# Altium PCB FM Electrosense Wideband Converter v2.0.PcbDoc (part 2 of 2)
Units mm, origin at the board's own origin, x right, y up, seen from the top; angles counter-clockwise.
Board outline 70 x 70 mm, 4 copper layers (Top Layer, InternalPlane1, InternalPlane2, Bottom Layer), stack 1.963 mm thick; 135 components, 101 nets, 455 pads, 396 vias.
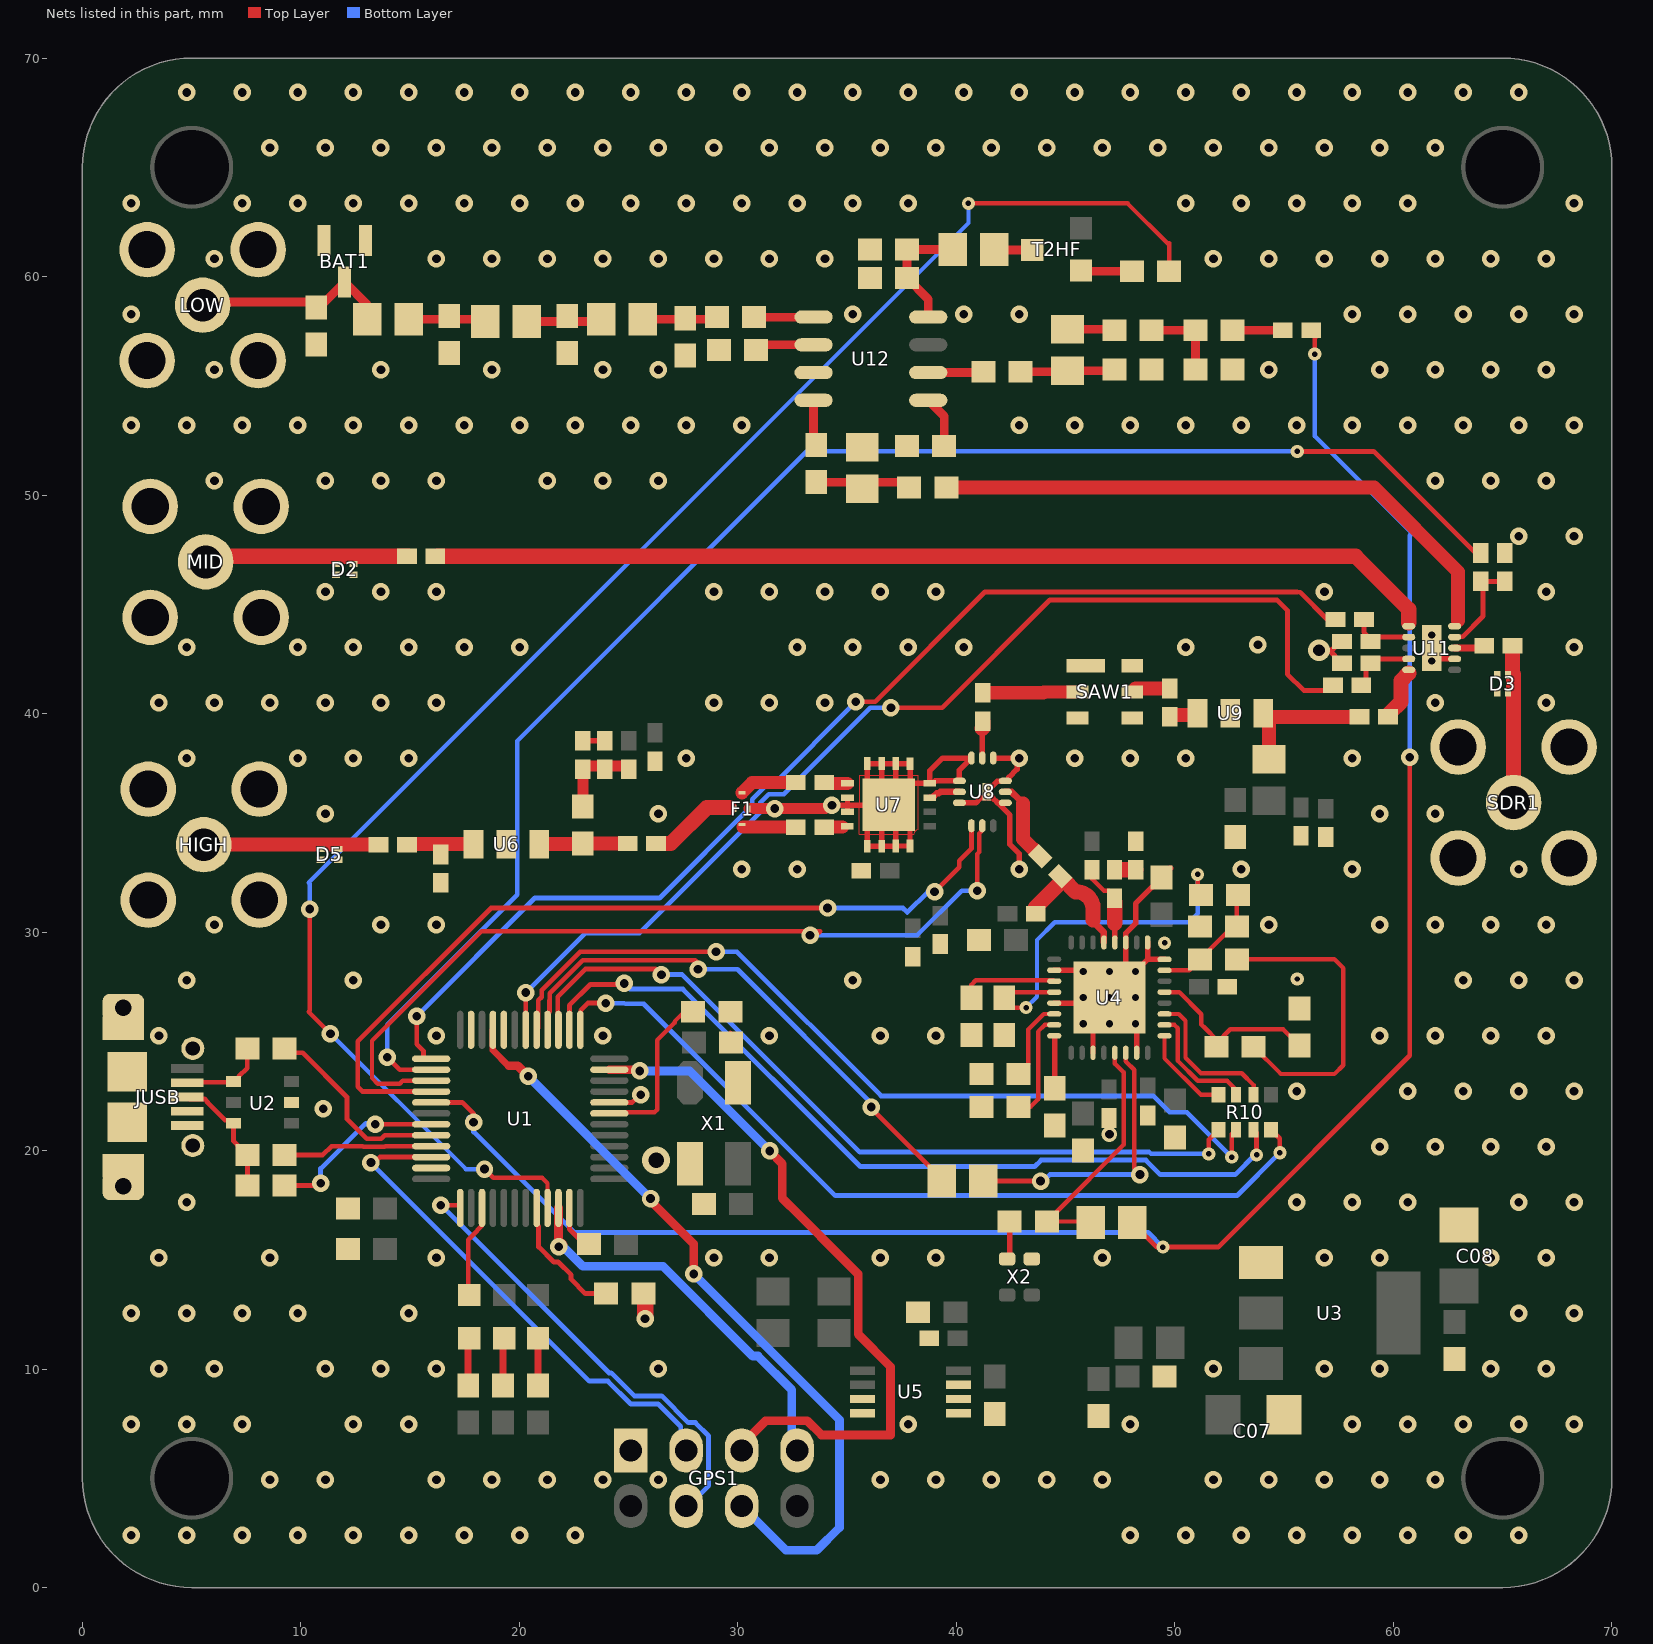
[diagram p4: the nets of this part, all layers, seen from the top]

## Via types
v1: diameter 0.8, hole 0.4, Top Layer to Bottom Layer, 354 vias
v2: diameter 0.6, hole 0.25, Top Layer to Bottom Layer, 20 vias
v3: diameter 0.66, hole 0.33, Top Layer to Bottom Layer, tented top, 11 vias
v4: diameter 1.27, hole 0.711, Top Layer to Bottom Layer, 9 vias
v5: diameter 1, hole 0.54, Top Layer to Bottom Layer, 1 vias
v6: diameter 0.7, hole 0.4, Top Layer to Bottom Layer, 1 vias

## Nets (pads, with @x,y where several pads share a name; then routed paths per layer and width w, separated by ;. In a path a pad name is that pad's centre, name@x,y a point inside that pad or via, vN(x,y) a via of type N, cw(c..) or ccw(c..) an arc to the next point about the centre after c; other vN are vias at no path point) (continued)
CPU_TX: GPS1.6 U1.21 | length 35.9
  Top Layer w0.3: U1.21@18.786,25.525 18.786,24.593 19.504,23.875
  Top Layer w0.4: 19.504,23.875 19.925,23.875 v1(20.4,23.4) ; v1(26,17.8) 26,17.7 27.98,15.72 v1(27.98,14.35) ; GPS1.6@30.17,3.73 GPS1.6@30.17,4.288
  Bottom Layer w0.4: v1(20.4,23.4) v1(26,17.8) ; v1(27.98,14.35) 34.65,7.68 34.65,2.75 33.6,1.7 32.2,1.7 GPS1.6@30.17,3.73
CPU_USB_LED: U1.39 USB.2 | length 3.9
  Top Layer w0.22: USB.2@17.654,13.687 17.654,15.915 18.066,16.327 18.066,16.348 18.271,16.553 18.271,17.36 U1.39@18.286,17.375
CS_PLL: R10.5 U1.14 | length 38.5
  Top Layer w0.22: U1.14@22.286,25.525 22.286,26.65 23.236,27.6 24.65,27.6 v1@24.8,27.75 ; R10.5@53.6,20.95 53.736,20.814 v2(53.736,19.8)
  Bottom Layer w0.22: v1(24.8,27.65) 25.06,27.39 27.48,27.39 35.6,19.27 43.587,19.27 43.877,19.56 48.673,19.56 49.333,18.9 52.764,18.9 53.664,19.8 v2(53.736,19.8)
CS_U1: R10.6 U4.3 | length 6.9
  Top Layer w0.2: U4.3@49.525,26.25 50.178,26.25 50.486,25.942 50.486,24.247 51.191,23.542 53.058,23.542 53.6,23 R10.6@53.6,22.55
GND: BAT1.1 BAT1.2 C01.1 C02.1 C03.1 C04.1 C05.1 C06.1 C07.2 C08.2 C09.1 C10.1 C11.1 C12.1 C13.1 C14.1 C15.1 C16.1 C17.1 C18.1 C19.1 C20.1 C21.1 C22.1 C23.1 C25.1 C28.1 C29.1 C32.1 C33.2 C34.1 C38.1 C39.1 C40.1 C41.1 C45.2 C46.2 C47.1 C54.1 C55.1 C56.1 C57.1 C58.1 C59.1 C60.1 C62.2 C64.1 D2.1 D2.2 D3.1 D3.2 D5.1 D5.2 F1.4 GPS1.1 HIGH.2 HIGH.3 HIGH.4 HIGH.5 JUSB.4 JUSB.5 JUSB.6 L9.1 LOW.2 LOW.3 LOW.4 LOW.5 MID.2 MID.3 MID.4 MID.5 R01.1 R08.1 R14.1 R17.1 R24.1 R26.1 R27.2 R28.2 SAW1.1 SAW1.3 SAW1.4 SAW1.6 SDR1.2 SDR1.3 SDR1.4 SDR1.5 U1.8 U1.20 U1.23 U1.35 U1.47 U2.2 U3.1 U4.8 U4.9 U4.11 U4.18 U4.21 U4.27 U4.31 U4.33 U5.3 U5.4 U5.5 U5.6 U5.7 U6.2 U7.4 U7.5 U7.6 U7.7 U7.8 U7.10 U7.11 U7.13 U7.14 U7.15 U7.16 U7.17 U8.1 U8.3 U8.4 U8.6 U8.10 U8.12 U8.13 U9.2 U11.7 U11.11 U12.3 X1.2 X1.4 X2.2 | length 76.4
  Top Layer w0.22: JUSB.6@1.8,18.012 2.148,18.36 JUSB.6@1.87,18.36 ; U1.35@15.946,19.185 U1.35@15.961,19.2 ; U1.47@22.286,17.375 22.286,16.409 22.975,15.72 C02.1@23.183,15.72 ; U1.8@24.111,22.2 25.15,22.203 v1(25.55,22.55) ; C05.1@29.65,25.39 30.04,25 30.08,25 C05.1@29.861,25.219 ; C06.1@29.861,26.139 C06.1@29.65,26.35 29.69,26.35 C06.1@30.08,25.96 ; C19.1@46.986,21.492 46.986,20.784 ccw(c47.034,20.784) v6(47,20.75)
  Top Layer w0.25: C33.2@22.9,38.75 C34.1@23.909,38.75 ; v1@34.001,35.65 34.151,35.8 v1(34.3,35.8) 35.013,35.8 ; U7.11@35.013,35.498 35.013,35.8 ; U7.10@35.013,36.15 35.013,35.8 ; U7.13@35.925,33.936 U7.13@35.925,33.936 ; U8.6@40.136,35.915 40.886,35.915 41.111,36.14 41.311,36.14 U8.13@41.386,36.215 ; U8.1@41.686,37.965 42.855,37.965 v1(42.87,37.95) 42.773,37.853 42.773,37.451 42.396,37.074 42.396,36.938 42.372,36.915 U8.12@42.236,36.915 42.226,36.905 41.876,36.905 41.661,36.69 41.461,36.69 41.386,36.615 U8.13@41.386,36.415 U8.13@41.386,36.215 ; U8.10@42.236,35.915 42.226,35.924 41.876,35.924 ; v1(42.87,32.87) 42.87,33.589 42.45,34.009 42.45,35.351 41.876,35.924 ; U4.21@44.475,26.75 U4.33@46.75,26.75 ; U4.18@44.475,28.25 45.75,28.25 v3(45.8,28.2) v3(47,27) ; U4.27@46.25,24.475 46.25,26.25 U4.33@46.75,26.75 ; U4.31@48.25,24.475 48.25,25.75 v3(48.2,25.8) v3(47,27) ; U4.9@48.75,29.525 48.75,28.75 ; U4.8@49.525,28.75 48.75,28.75 ; C15.1@49.811,32.917 49.761,32.917 49.386,32.542 C15.1@49.386,32.492 49.386,32.442 49.011,32.067 48.961,32.067 48.2,31.306 48.2,30.4 47.75,29.95 U4.11@47.75,29.525 U4.33@47.75,27.75 ; v5(56.6,42.9) 57.179,42.9 ; C54.1@57.65,42.3 57.55,42.3 57.325,42.525 57.325,42.625 57.179,42.771 57.179,42.9 ; C55.1@57.65,43.3 57.55,43.3 57.325,43.075 57.325,43.046 57.179,42.9 ; U11.11@61.75,43 61.75,42.825 62.075,42.5 U11.7@62.8,42.5 ; 35.013,35.8 35.55,35.8 35.638,35.8 U7.17@36.875,35.8 ; U7.13@35.925,33.936 U7.14@36.575,33.936 ; U7.13@35.925,33.936 35.925,34.475 35.925,34.588 35.925,34.85 U7.17@36.575,35.5 ; U7.14@36.575,33.936 37.224,33.936 U7.15@37.226,33.938 ; U7.14@36.575,33.936 36.575,34.475 36.575,34.588 U7.17@36.575,35.5 ; U7.17@36.575,35.5 U7.17@36.875,35.8 ; U7.17@36.575,36.15 U7.17@36.9,35.825 ; U7.17@36.575,36.15 35.925,36.8 35.925,37.063 35.925,37.175 U7.8@35.925,37.713 U7.7@36.575,37.713 ; U7.17@36.575,36.15 36.575,37.063 36.575,37.175 U7.7@36.575,37.713 ; U7.7@36.575,37.713 U7.6@37.225,37.713 ; U7.17@36.875,35.8 U7.17@36.9,35.825 ; U7.17@36.9,35.825 U7.17@37.225,36.15 ; U7.17@36.9,35.825 U7.17@37.226,35.499 ; U7.17@37.225,36.15 U7.17@37.875,36.8 ; U7.17@37.225,36.15 37.225,37.063 37.225,37.175 U7.6@37.225,37.713 ; U7.6@37.225,37.713 37.227,37.711 U7.5@37.875,37.711 37.875,37.175 37.875,37.063 U7.17@37.875,36.8 ; U7.15@37.226,33.938 37.227,33.937 U7.16@37.875,33.937 37.875,34.475 37.875,34.588 37.875,34.85 U7.17@37.226,35.499 ; U7.15@37.226,33.938 37.226,34.475 37.226,34.588 U7.17@37.226,35.499 ; U7.17@37.875,36.8 38.137,36.8 38.25,36.8 U7.4@38.787,36.8 ; U7.4@38.787,36.8 38.787,37.387 39.365,37.965 U8.3@40.686,37.965 40.686,37.828 40.663,37.805 40.526,37.805 40.136,37.415 U8.4@40.136,36.915 39.039,36.915 38.925,36.8 U7.4@38.787,36.8 ; U8.13@41.386,36.215 41.461,36.14 41.661,36.14 41.876,35.924 ; U4.33@46.75,26.75 v3(47,27) ; v3(47,27) U4.33@47.75,27.75 ; U4.33@47.75,27.75 48.75,28.75
  Top Layer w0.5: F1.4@30.511,35.65 v1(31.686,35.65) v1@34.001,35.65
  Top Layer w0.75: v1(25.75,12.3) R01.1@25.75,13.4
  other v1: 2.23,2.39 4.77,2.39 7.31,2.39 9.85,2.39 12.39,2.39 14.93,2.39 17.47,2.39 20.01,2.39 22.55,2.39 47.95,2.39 50.49,2.39 53.03,2.39 55.57,2.39 58.11,2.39 60.65,2.39 63.19,2.39 65.73,2.39 8.58,4.93 11.12,4.93 16.2,4.93 18.74,4.93 21.28,4.93 23.82,4.93 26.36,4.93 36.52,4.93 39.06,4.93 41.6,4.93 44.14,4.93 46.68,4.93 51.76,4.93 54.3,4.93 56.84,4.93 59.38,4.93 61.92,4.93 2.23,7.47 4.77,7.47 7.31,7.47 12.39,7.47 14.93,7.47 37.79,7.47 47.95,7.47 58.11,7.47 60.65,7.47 63.19,7.47 65.73,7.47 68.27,7.47 3.5,10.01 6.04,10.01 11.12,10.01 13.66,10.01 16.2,10.01 26.36,10.01 51.76,10.01 56.84,10.01 59.38,10.01 64.46,10.01 67,10.01 2.23,12.55 4.77,12.55 7.31,12.55 9.85,12.55 14.93,12.55 65.73,12.55 68.27,12.55 3.5,15.09 8.58,15.09 16.2,15.09 28.9,15.09 31.44,15.09 36.52,15.09 39.06,15.09 46.68,15.09 56.84,15.09 59.38,15.09 64.46,15.09 67,15.09 4.77,17.63 55.57,17.63 58.11,17.63 60.65,17.63 65.73,17.63 68.27,17.63 59.38,20.17 61.92,20.17 64.46,20.17 67,20.17 11.02,21.916 55.57,22.71 60.65,22.71 63.19,22.71 65.73,22.71 68.27,22.71 3.5,25.25 16.2,25.25 23.82,25.25 31.44,25.25 36.52,25.25 39.06,25.25 59.38,25.25 61.92,25.25 64.46,25.25 67,25.25 4.77,27.79 12.39,27.79 35.25,27.79 63.19,27.79 65.73,27.79 68.27,27.79 6.04,30.33 13.66,30.33 16.2,30.33 54.3,30.33 59.38,30.33 61.92,30.33 64.46,30.33 67,30.33 30.17,32.87 32.71,32.87 53.03,32.87 58.11,32.87 65.73,32.87 11.12,35.41 26.36,35.41 59.38,35.41 61.92,35.41 4.77,37.95 9.85,37.95 12.39,37.95 14.93,37.95 27.63,37.95 45.41,37.95 47.95,37.95 50.49,37.95 58.11,37.95 3.5,40.49 6.04,40.49 8.58,40.49 11.12,40.49 13.66,40.49 16.2,40.49 28.9,40.49 31.44,40.49 33.98,40.49 61.92,40.49 67,40.49 4.77,43.03 9.85,43.03 12.39,43.03 14.93,43.03 17.47,43.03 20.01,43.03 32.71,43.03 35.25,43.03 37.79,43.03 40.33,43.03 50.49,43.03 68.27,43.03 53.8,43.15 11.12,45.57 13.66,45.57 16.2,45.57 28.9,45.57 31.44,45.57 33.98,45.57 36.52,45.57 39.06,45.57 56.84,45.57 67,45.57 65.73,48.11 68.27,48.11 6.04,50.65 11.12,50.65 13.66,50.65 16.2,50.65 21.28,50.65 23.82,50.65 26.36,50.65 61.92,50.65 64.46,50.65 67,50.65 2.23,53.19 4.77,53.19 7.31,53.19 9.85,53.19 12.39,53.19 14.93,53.19 17.47,53.19 20.01,53.19 22.55,53.19 25.09,53.19 27.63,53.19 30.17,53.19 42.87,53.19 45.41,53.19 47.95,53.19 50.49,53.19 53.03,53.19 55.57,53.19 58.11,53.19 60.65,53.19 63.19,53.19 65.73,53.19 68.27,53.19 6.04,55.73 13.66,55.73 18.74,55.73 23.82,55.73 26.36,55.73 54.3,55.73 59.38,55.73 61.92,55.73 64.46,55.73 67,55.73 2.23,58.27 35.25,58.27 40.33,58.27 42.87,58.27 58.11,58.27 60.65,58.27 63.19,58.27 65.73,58.27 68.27,58.27 6.04,60.81 16.2,60.81 18.74,60.81 21.28,60.81 23.82,60.81 26.36,60.81 28.9,60.81 31.44,60.81 33.98,60.81 51.76,60.81 54.3,60.81 56.84,60.81 59.38,60.81 61.92,60.81 64.46,60.81 67,60.81 2.23,63.35 7.31,63.35 9.85,63.35 12.39,63.35 14.93,63.35 17.47,63.35 20.01,63.35 22.55,63.35 25.09,63.35 27.63,63.35 30.17,63.35 32.71,63.35 35.25,63.35 37.79,63.35 50.49,63.35 53.03,63.35 55.57,63.35 58.11,63.35 60.65,63.35 68.27,63.35 8.58,65.89 11.12,65.89 13.66,65.89 16.2,65.89 18.74,65.89 21.28,65.89 23.82,65.89 26.36,65.89 28.9,65.89 31.44,65.89 33.98,65.89 36.52,65.89 39.06,65.89 41.6,65.89 44.14,65.89 46.68,65.89 49.22,65.89 51.76,65.89 54.3,65.89 56.84,65.89 59.38,65.89 61.92,65.89 4.77,68.43 7.31,68.43 9.85,68.43 12.39,68.43 14.93,68.43 17.47,68.43 20.01,68.43 22.55,68.43 25.09,68.43 27.63,68.43 30.17,68.43 32.71,68.43 35.25,68.43 37.79,68.43 40.33,68.43 42.87,68.43 45.41,68.43 47.95,68.43 50.49,68.43 53.03,68.43 55.57,68.43 58.11,68.43 60.65,68.43 63.19,68.43 65.73,68.43
  other v2: 55.6,27.85 49.525,29.5
  other v3: 45.8,25.8 47,25.8 45.8,27 48.2,27 47,28.2 48.2,28.2 61.75,42.4 61.75,43.6
  other v4: 26.254,19.554
GPS_RST: GPS1.7 U1.46 | length 18.3
  Top Layer w0.4: U1.46@21.786,17.375 21.786,15.9 22,15.686 21.914,15.6 v1(21.8,15.6)
  Bottom Layer w0.4: v1(21.8,15.6) 22,15.6 22.9,14.7 26.569,14.7 30.678,10.591 30.916,10.591 32.458,9.05 32.458,6.776 32.71,6.524 GPS1.7@32.71,6.27
IMG_F_HIGH: C36.1 F1.3 | length 2.4
  Top Layer w0.6: 30.236,34.8 C36.1@32.65,34.8
IMG_F_LOW: C37.1 F1.1 | length 2.7
  Top Layer w0.6: F1.1@30.186,36.375 30.655,36.845 C37.1@32.65,36.845
LO+: C26.2 U8.11 | length 3.5
  Top Layer w0.3: U8.11@42.236,36.415 42.522,36.415 42.836,36.101
  Top Layer w0.65: 43.05,35.886 43.05,34.257 C26.2@43.84,33.467
LO-: C27.2 R14.2 | length 1
  Top Layer w0.7: C27.2@47.236,32.85 R14.2@48.2,32.85
MCO: C67.2 R11.2 U1.29 | length 88.6
  Top Layer w0.2: v2(56.4,56.45) 56.4,57.15 56.436,57.186
  Top Layer w0.22: U1.29@15.961,22.2 17.379,22.2 17.9,21.679 v1(17.9,21.29) ; R11.2@48.05,16.7 49.171,15.579 v2(49.45,15.579) 51.979,15.579 60.75,24.35 v1(60.75,38)
  Bottom Layer w0.2: v2(56.4,56.45) 56.4,52.7 60.85,48.25
  Bottom Layer w0.22: v1@17.68,21.51 v1(17.9,21.29) 17.9,20.85 22.5,16.25 48.779,16.25 v2(49.45,15.579) ; v1(60.75,38) 60.75,48.15 60.85,48.25
MIX_EN: U1.28 U8.7 | length 38.4
  Top Layer w0.22: U1.28@15.961,22.7 12.819,22.7 12.6,22.919 12.6,25 18.7,31.1 v1(34.1,31.1) ; v1(39,31.842) 40.126,32.968 40.126,33.255 40.686,33.815 U8.7@40.686,34.865
  Bottom Layer w0.22: v1(34.1,31.1) 37.55,31.1 37.75,30.9 v1@38.7,31.85
MIX_X2: U1.27 U8.8 | length 39.3
  Top Layer w0.2: U1.27@15.961,23.2 14.659,23.2 14.519,23.06 13.507,23.06 13.25,23.317 13.25,25.019 18.268,30.038 33.762,30.038 33.575,29.85 v1(33.3,29.85) ; v1(40.95,31.89) 40.95,33.57 41.046,33.666 41.046,34.509 41.136,34.599 41.136,34.638 41.186,34.688 U8.8@41.186,34.865
  Bottom Layer w0.2: v1(33.3,29.85) 38.2,29.85 40.24,31.89 v1(40.95,31.89)
Mixer_switch_in: C44.2 U11.5 | length 2.2
  Top Layer w0.7: C44.2@59.831,40.019 60.35,40.538 60.35,41.5 60.7,41.85
MOSI: R10.3 U1.17 | length 39.4
  Top Layer w0.22: U1.17@20.786,25.525 20.86,25.599 20.86,26.87 21.016,27.027 21.016,27.344 22.772,29.1 v1@28.986,29.1 ; v2(52.6,19.7) 52.6,20.75 R10.3@52.8,20.95
  Bottom Layer w0.22: v1(29,29.1) 29.95,29.1 36.55,22.5 49.008,22.5 49.754,21.754 50.546,21.754 v2(52.6,19.7)
MOSI_U1: R10.4 U4.2 | length 5.6
  Top Layer w0.2: U4.2@49.525,25.75 49.978,25.75 50.136,25.592 50.136,24.102 51.046,23.192 52.387,23.192 52.8,22.779 R10.4@52.8,22.55
MUXOUT_U1: R09.2 U4.30 | length 13.3
  Top Layer w0.2: U4.30@47.75,24.475 47.75,24.078 48.136,23.692 48.136,19.164 v1(48.4,18.9) v1@48.5,18.8
  Top Layer w0.22: R09.2@41.236,18.6 43.394,18.6 v1(43.85,18.6)
  Bottom Layer w0.22: v1(43.85,18.6) 43.969,18.6 44.269,18.9 v1(48.4,18.9)
NetC06_2: C06.2 U1.7 | length 7.2
  Top Layer w0.2: U1.7@24.111,21.7 24.863,21.7 24.913,21.75 26.183,21.75 26.3,21.867 26.3,25.05 27.1,25.85 27.1,25.9 27.5,26.3 C06.2@27.55,26.3
NetC20_2: C20.2 U4.23 | length 5
  Top Layer w0.2: C20.2@42.85,22 43.394,22 43.736,22.342 43.736,25.442 44.044,25.75 U4.23@44.475,25.75
NetC21_2: C21.2 U4.19 | length 4.5
  Top Layer w0.2: C21.2@40.686,26.992 40.686,27.592 40.886,27.792 44.433,27.792 U4.19@44.475,27.75
NetC22_2: C22.2 U4.24 | length 2.4
  Top Layer w0.25: U4.24@44.475,25.25 44.5,25.225 C22.2@44.5,22.85
NetC23_2: C23.2 C24.2 R15.1 U4.7 | length 5.7
  Top Layer w0.2: U4.7@49.525,28.25 50.65,28.25 C24.2@51.15,28.75 52.65,30.25 C23.2@52.85,30.25 52.836,30.264 R15.1@52.836,31.742
NetC24_1: C24.1 R16.2 | length 14.2
  Top Layer w0.2: C24.1@52.85,28.75 57.3,28.75 57.7,28.35 57.7,23.9 57.3,23.5 54.85,23.5 R16.2@53.6,24.75
NetC31_1: C31.1 C32.2 U6.1 | length 2.8
  Top Layer w0.635: C31.1@15.122,34 15.147,34.025 U6.1@17.9,34.025
NetC31_2: C31.2 D5.3 D5.4 HIGH.1 | length 7.8
  Top Layer w0.635: HIGH.1@5.55,34 10.9,34 11.7,34 C31.2@13.35,34
NetC33_1: C33.1 C34.2 L2.2 R20.2 | length 4
  Top Layer w0.22: C33.1@22.9,37.59 C33.1@22.9,37.65
  Top Layer w0.5: L2.2@22.9,35.75 C33.1@22.9,37.45 22.9,37.59 23.909,37.59 R20.2@25,37.59
NetC35_1: C35.1 L2.1 U6.3 | length 4.1
  Top Layer w0.22: L2.1@22.875,34.025 L2.1@22.9,34.05
  Top Layer w0.635: U6.3@20.9,34.025 L2.1@22.875,34.025 ; L2.1@22.9,34.05 C35.1@24.95,34.05
NetC35_2: C35.2 F1.2 | length 4
  Top Layer w0.7: C35.2@26.25,34.05 26.925,34.05 28.575,35.7 29.6,35.7
NetC42_1: C42.1 U8.2 | length 1.7
  Top Layer w0.25: U8.2@41.186,37.965 C42.1@41.186,39.331
  Top Layer w0.7: C42.1@41.186,39.331 41.2,39.345 C42.1@41.2,39.65
NetC42_2: C42.2 SAW1.2 | length 4.4
  Top Layer w0.22: 43.96,40.963 43.985,40.988
  Top Layer w0.6: C42.2@41.2,40.95 43.985,40.95 ; 43.985,40.988 SAW1.2@45.547,40.988
NetC43_1: C43.1 SAW1.5 | length 1.9
  Top Layer w0.22: SAW1.5@48.047,40.988 SAW1.5@48.21,41.15 ; C43.1@49.761,41.25 C43.1@49.861,41.15
  Top Layer w0.65: SAW1.5@48.21,41.15 C43.1@49.761,41.15
NetC43_2: C43.2 U9.1 | length 1.4
  Top Layer w0.635: C43.2@49.761,39.85 49.761,39.9 49.794,39.932 50.954,39.932 U9.1@51.036,40.014
NetC44_1: C44.1 L3.1 U9.3 | length 7.1
  Top Layer w0.635: L3.1@54.036,38.164 L3.1@54.3,37.9 54.3,39.55 54.036,39.814 U9.3@54.036,39.983 ; U9.3@54.036,40.014 U9.3@54.036,39.983 ; C44.1@58.45,39.85 54.168,39.85 U9.3@54.036,39.983
NetC51_1: C51.1 D2.3 D2.4 MID.1 | length 9.3
  Top Layer w0.7: MID.1@5.65,47.05 5.8,47.2 C51.1@14.897,47.2
NetC51_2: C51.2 U11.1 | length 46.1
  Top Layer w0.7: C51.2@16.25,47.2 58.274,47.2 60.7,44.774 60.7,44.15
NetC53_1: C53.1 U11.8 | length 1.1
  Top Layer w0.3: U11.8@62.8,43 C53.1@63.85,43
NetC53_2: C53.2 D3.3 D3.4 SDR1.1 | length 7.1
  Top Layer w0.7: C53.2@65.45,43.05 65.45,41.85 65.5,41.8 65.5,41.04 SDR1.1@65.5,35.928
NetC54_2: C54.2 R21.2 U11.4 | length 2.9
  Top Layer w0.22: R21.2@58.4,41.056 58.75,41.406 C54.2@58.75,42.208 ; C54.2@59.05,42.5 U11.4@60.7,42.5
NetC55_2: C55.2 R22.2 U11.2 | length 2.7
  Top Layer w0.22: R22.2@58.65,44.3 58.65,43.725 58.875,43.5 U11.2@60.7,43.5
NetC56_2: C56.2 R23.2 U11.9 | length 4.1
  Top Layer w0.22: U11.9@62.8,43.5 62.815,43.515 63.165,43.515 64.1,44.45 R23.2@64.1,45.95 ; R23.2@64.155,46.05 C56.2@65.1,46.05
NetC57_2: C57.2 C58.2 L5.1 U12.8 | length 5.6
  Top Layer w0.4: U12.8@38.711,58.147 38.711,58.967 C57.2@37.736,59.942 C58.2@37.736,61.242 L5.1@39.836,61.242
NetC59_2: C59.2 L6.1 L7.2 | length 3.5
  Top Layer w0.4: L6.1@14.936,58.042 18.336,58.042 L7.2@18.436,57.942
NetC60_2: C60.2 L7.1 L8.2 | length 3.4
  Top Layer w0.4: L7.1@20.336,57.942 23.636,57.942 L8.2@23.736,58.042
NetC61_2: C61.2 L8.1 R26.2 | length 3.4
  Top Layer w0.4: L8.1@25.636,58.042 28.936,58.042 C61.2@29.036,58.142
NetC65_2: C65.2 C66.1 L9.2 | length 4.4
  Top Layer w0.4: C65.2@33.586,50.592 37.586,50.592 C66.1@37.836,50.342
NetC67_1: C67.1 R36HF.2 | length 2.1
  Top Layer w0.4: R36HF.2@52.636,57.542 C67.1@54.736,57.542
NetC68_1: C68.1 L10.2 | length 2.2
  Top Layer w0.4: L10.2@45.086,57.592 47.186,57.592 C68.1@47.236,57.542
NetC68_2: C68.2 R27.1 R36HF.1 | length 3.8
  Top Layer w0.4: C68.2@48.936,57.542 R36HF.1@50.936,57.542 R27.1@50.936,55.742
NetL5_2: L5.2 T2HF.3 | length 1.7
  Top Layer w0.4: L5.2@41.736,61.242 41.761,61.217 T2HF.3@43.468,61.217
NetLOCK_1: LOCK.1 R03.1 | length 1.9
  Top Layer w0.32: R03.1@19.254,9.246 LOCK.1@19.254,11.105
NetMIX_1: MIX.1 R04.1 | length 1.9
  Top Layer w0.32: R04.1@20.854,9.246 MIX.1@20.854,11.105
NetR01_2: R01.2 U1.44 | length 6
  Top Layer w0.22: U1.44@20.786,17.375 20.786,16.628 20.876,16.538 20.876,15.591 21.568,14.899 21.776,14.899 22.362,14.313 22.362,14.105 23.017,13.45 23.55,13.45 23.9,13.8 R01.2@23.95,13.8
NetR02_1: R02.1 USB.1 | length 1.9
  Top Layer w0.32: R02.1@17.654,9.246 USB.1@17.654,11.105
NetR08_2: R08.2 U4.22 | length 3.7
  Top Layer w0.2: R08.2@42.85,23.5 43.286,23.936 43.286,25.542 43.994,26.25 U4.22@44.475,26.25
NetR10_2: R10.2 U4.1 | length 4.2
  Top Layer w0.2: U4.1@49.525,25.25 49.525,24.218 51.193,22.55 R10.2@52,22.55
NetU7_3: U7.3 U8.5 | length 1.5
  Top Layer w0.3: U7.3@38.787,36.15 38.925,36.15 38.925,36.174 39.101,36.35 39.199,36.35 39.263,36.415 U8.5@40.136,36.415
PLL_EN: R10.7 U1.13 | length 38.8
  Top Layer w0.22: U1.13@22.786,25.525 22.801,25.54 22.801,26.415 23.132,26.746 v1(23.946,26.746) ; R10.7@54.4,20.95 54.8,20.55 v2(54.8,19.9)
  Bottom Layer w0.22: v1(23.946,26.746) 23.879,26.75 23.946,26.748 25.7,26.7 34.46,17.94 52.84,17.94 v2(54.8,19.9)
PLL_MISO: R09.1 U1.16 | length 24.9
  Top Layer w0.22: U1.16@21.286,25.525 21.286,26.272 21.376,26.362 21.376,26.863 21.386,26.873 21.386,27.191 22.905,28.71 28.04,28.71 v1@28.4,28.35 ; v1@36.175,22.125 36.175,21.861 39.336,18.7 R09.1@39.336,18.6
  Bottom Layer w0.22: v1(28.175,28.3) 29.979,28.3 36.154,22.125 v1@36.175,22.125
  other v1: 36.1,21.987
PPS_IN: GPS1.5 U1.11 | length 32
  Top Layer w0.4: U1.11@24.111,23.7 25.442,23.7 v1(25.5,23.642) ; GPS1.5@30.17,6.27 30.17,6.54 31.266,7.636 33.171,7.636 33.822,6.985 36.984,6.984 36.984,10.103 35.5,11.587 35.5,14.345 34.7,15.145 32.8,17.05 32.029,17.821 32.029,19.4 v1(31.45,19.979)
  Bottom Layer w0.4: v1(25.5,23.642) 27.787,23.642 v1(31.45,19.979)
REF_PLL: C30.2 R11.1 U4.29 | length 11.4
  Top Layer w0.2: C30.2@44.136,16.75 C30.2@44.186,16.75 ; R11.1@46.15,16.7 46.1,16.75 C30.2@44.186,16.75 ; U4.29@47.25,24.475 47.25,23.978 47.65,23.578 47.65,20.264 44.586,17.2 44.586,17.15 C30.2@44.186,16.75
RFOUTA+: C26.1 R12.1 U4.13 | length 5.9
  Top Layer w0.2: R12.1@43.636,30.842 R12.1@43.636,31.142
  Top Layer w0.3: 46.25,30.55 46.25,30.481 46.75,29.981 U4.13@46.75,29.525
  Top Layer w0.7: R12.1@43.636,31.142 44.893,32.399 45.45,31.842 cw(c45.479,31.071) 46.25,31.1 46.25,30.55
RFOUTA-: C27.1 R13.1 U4.12 | length 3.7
  Top Layer w0.2: R13.1@46.2,32.85 46.2,32.442 46.752,31.89 46.986,31.89 47.25,31.626 C27.1@47.25,31.392
  Top Layer w0.25: U4.12@47.25,29.725 47.25,30.4
  Top Layer w0.7: 47.25,30.4 C27.1@47.25,31.392
SCK: R10.1 U1.15 | length 36.6
  Top Layer w0.22: 21.756,26.72 21.756,26.337 21.771,26.322 21.771,25.54 U1.15@21.786,25.525 ; 21.756,26.72 21.756,27.038 23.028,28.31 26.24,28.31 v1(26.5,28.05) ; v2(51.55,19.85) 51.55,20.5 R10.1@52,20.95
  Bottom Layer w0.22: v1(26.5,28.05) 27.45,28.05 35.57,19.93 48.827,19.93 48.907,19.85 v2(51.55,19.85)
SMA_SW: BAT1.3 L6.2 LOW.1 R24.2 | length 9
  Top Layer w0.4: LOW.1@5.5,58.836 11.086,58.836 BAT1.3@12,59.75 13.036,58.714 L6.2@13.036,58.042
SW_BYPASS: R22.1 U1.25 | length 53.1
  Top Layer w0.22: v1(15.3,26.15) 15.3,24.861 15.61,24.551 15.61,24.237 15.647,24.2 U1.25@15.961,24.2 ; v1(35.397,40.538) 36.275,40.538 41.306,45.569 55.6,45.569 ; 55.7,45.55 55.733,45.55 56.983,44.3 R22.1@57.35,44.3
  Bottom Layer w0.22: v1(15.3,26.15) 20.708,31.558 26.417,31.558 30.656,35.797 30.656,36.077 31.259,36.68 31.539,36.68 v1(35.397,40.538)
SW_MIX: R21.1 U1.18 | length 49.8
  Top Layer w0.22: U1.18@20.286,25.525 v1(20.286,27.23) ; v1(37,40.264) 39.346,40.264 44.281,45.199 54.669,45.199 55.15,44.718 55.15,41.8 55.894,41.056 R21.1@57.233,41.056
  Bottom Layer w0.22: v1(20.286,27.23) 23.006,29.95 25.493,29.95 31.026,35.483 31.026,35.923 31.413,36.31 32.102,36.31 36.057,40.264 v1(37,40.264)
SW_MIX_CPU: R23.1 U1.26 | length 70.7
  Top Layer w0.2: v1(13.95,24.275) 14.525,23.7 U1.26@15.961,23.7
  Top Layer w0.22: v2(55.6,52) 59.1,52 63.75,47.35 R23.1@64,47.35
  Bottom Layer w0.2: v1(13.95,24.275) 13.95,25.759 19.895,31.704 19.895,38.745 33.15,52 v2(55.6,52)
SW_U1: R16.1 R17.2 U4.5 | length 8.3
  Top Layer w0.2: U4.5@49.525,27.25 50.196,27.25 51.204,26.242 51.204,25.77 51.382,25.592 51.386,25.592 51.9,25.078 R16.1@51.9,24.914 ; R16.1@51.9,24.75 R16.1@51.9,24.914 ; R17.2@55.7,24.8 54.95,25.55 52.536,25.55 R16.1@51.9,24.914
SWCLK: GPS1.4 U1.37 | length 21.3
  Top Layer w0.22: v1(16.4,17.5) 17.249,17.5 17.286,17.463 U1.37@17.286,17.375
  Bottom Layer w0.22: v1(16.4,17.5) 16.419,17.5 24.099,9.82 24.203,9.82 25.253,8.77 26.503,8.77 27.727,7.546 28.053,7.546 28.652,6.947 28.652,5.75 28.652,5.593 28.652,5.267 28.659,5.26 28.659,4.659 28.359,4.359 ; GPS1.4@27.63,3.73 27.729,3.73 28.358,4.359
SWDIO: GPS1.3 U1.34 | length 23.3
  Top Layer w0.22: v1(13.2,19.45) 13.357,19.45 13.607,19.7 U1.34@15.961,19.7
  Bottom Layer w0.22: v1(13.2,19.45) 23.2,9.45 24.05,9.45 25.1,8.4 26.35,8.4 27.38,7.37 27.38,6.52 GPS1.3@27.63,6.27
T2_BASE: R25.2 T2HF.1 | length 2.3
  Top Layer w0.4: T2HF.1@45.704,60.277 45.738,60.242 R25.2@48.036,60.242
TUNE: C25.2 R15.2 U4.20 | length 17.4
  Top Layer w0.2: C25.2@42.186,26.992 42.636,26.542 v2(43.186,26.542) ; C25.2@42.25,27.1 42.4,27.25 U4.20@44.475,27.25 ; v2(51.036,32.642) 51.036,31.842 R15.2@51.186,31.692
  Bottom Layer w0.2: v2(43.186,26.542) 43.686,27.042 43.686,29.636 44.5,30.45 50.65,30.45 51.036,30.836 v2(51.036,32.642)
U15_INA: C61.1 U12.1 | length 2.7
  Top Layer w0.4: C61.1@30.736,58.142 33.456,58.142 U12.1@33.461,58.147
U15_INB: C62.1 U12.2 | length 2.7
  Top Layer w0.4: C62.1@30.836,56.642 31.071,56.877 U12.2@33.461,56.877
U15_OSCB: C63.1 U12.6 | length 2.5
  Top Layer w0.4: U12.6@38.711,55.607 41.201,55.607 C63.1@41.236,55.642
U15_OSCB_FILTERED: C63.2 L10.1 R28.1 | length 4.3
  Top Layer w0.4: C63.2@42.936,55.642 45.036,55.642 L10.1@45.086,55.692 47.186,55.692 R28.1@47.236,55.742
U15_OUTA: C65.1 U12.4 | length 2.1
  Top Layer w0.4: U12.4@33.461,54.337 33.461,52.417 C65.1@33.586,52.292
U15_OUTB: C64.2 U12.5 | length 2.4
  Top Layer w0.4: U12.5@38.711,54.337 39.436,53.612 C64.2@39.436,52.242
UPCONV_EN#: R25.1 U1.45 | length 76.1
  Top Layer w0.2: v1(10.4,31.05) 10.4,26.4 10.35,26.35 v1(11.35,25.35) ; v1(18.4,19.15) 18.8,18.75 21.035,18.75 21.286,18.499 U1.45@21.286,17.375 ; v2(40.55,63.35) 47.834,63.35 49.692,61.492 49.736,61.536 R25.1@49.736,60.242
  Bottom Layer w0.2: v1(10.4,31.05) 10.4,32.202 10.35,32.252 40.55,62.452 v2(40.55,63.35) ; v1(11.35,25.35) 17.55,19.15 v1(18.4,19.15)
UPCONV_IN: C66.2 U11.10 | length 27.3
  Top Layer w0.635: C66.2@39.536,50.342 59.108,50.342 62.96,46.49 62.96,44.25
URFSW_J1: C36.2 U7.12 | length 1.1
  Top Layer w0.25: U7.12@34.775,34.8 34.8,34.825 34.986,34.825 U7.12@35.011,34.85
  Top Layer w0.6: C36.2@33.95,34.8 U7.12@34.775,34.8
URFSW_J2: C37.2 U7.9 | length 1.1
  Top Layer w0.25: C37.2@33.95,36.845 C37.2@33.994,36.8
  Top Layer w0.6: C37.2@33.994,36.8 U7.9@35.013,36.8
USB_D+: R07.1 U1.33 | length 6.9
  Top Layer w0.22: R07.1@9.25,19.8 11,19.8 11.4,20.2 12.47,20.2 12.827,20.2 12.857,20.17 13.827,20.17 13.857,20.2 U1.33@15.961,20.2
USB_D+_CON: JUSB.3 R05.2 R07.2 U2.6 | length 5.7
  Top Layer w0.22: JUSB.3@4.8,22.45 4.89,22.36 5.586,22.36 5.715,22.231 5.715,22.203 6.528,21.39 6.775,21.39 U2.6@6.915,21.25 6.915,20.435 7.11,20.24 7.11,20.19 7.55,19.75 R05.2@7.55,18.4
USB_D-: R06.1 U1.32 | length 9
  Top Layer w0.22: R06.1@9.25,24.475 10.075,24.475 12.1,22.45 12.1,21.45 13.01,20.54 13.673,20.54 13.833,20.7 U1.32@15.961,20.7
USB_D-_CON: JUSB.2 R06.2 U2.4 | length 3.8
  Top Layer w0.22: JUSB.2@4.8,23.1 4.825,23.125 6.89,23.125 U2.4@6.915,23.15 7.015,23.15 7.155,23.29 7.155,23.39 7.539,23.774 7.539,24.464 R06.2@7.55,24.475
USB_EN: R05.1 U1.31 | length 8.3
  Top Layer w0.22: R05.1@9.25,18.4 10.8,18.4 v1(10.9,18.5) ; v1(13.4,21.2) 14.056,21.2 U1.31@15.961,21.2
  Bottom Layer w0.22: v1(10.9,18.5) 10.9,19.175 12.975,21.25 13.025,21.2 v1(13.4,21.2)
X1_OUT: C30.1 X2.3 | length 1.8
  Top Layer w0.25: X2.3@42.32,15.041 42.436,15.157 C30.1@42.436,16.75
pads on no net: C07.0 C08.0 H1.0 H2.0 H3.0 H4.0 U1.2 U1.3 U1.4 U1.10 U1.19 U1.30 U2.1 U2.3 U2.7 U4.14 U4.15 U4.25 U11.3 U11.6 U12.7 X2.1

## Polygon pours and split planes (outlines as drawn)
GND on Bottom Layer "GND_BOTTOM" (solid, pour order 34): 64.3,70 65,70 cw(c65,65) 70,65 70,5 cw(c65,5) 65,0 5,0 cw(c5,5) 0,5 0,65 cw(c5,65) 5,70
GND on Top Layer "GND_TOP" (solid, remove dead copper, pour order 33): 65.15,70 65,70 cw(c65,65) 70,65 70,5 cw(c65.005,4.995) 65,0 5,0 cw(c5,5) 0,5 0,65 cw(c5,65) 5,70
3V3 on InternalPlane2 (split plane): 65.294,69.482 65.586,69.453 65.876,69.406 66.163,69.339 66.444,69.254 66.719,69.15 66.987,69.029 67.246,68.89 67.496,68.735 67.734,68.564 67.962,68.377 68.176,68.176 68.377,67.962 68.564,67.734 68.735,67.496 68.89,67.246 69.029,66.987 69.15,66.719 69.253,66.444 69.339,66.163 69.406,65.876 69.453,65.586 69.482,65.294 69.491,65.018 69.49,65 69.49,5 69.491,4.982 69.482,4.706 69.453,4.414 69.406,4.124 69.339,3.837 69.253,3.556 69.15,3.281 69.029,3.013 68.89,2.754 68.735,2.504 68.564,2.266 68.377,2.038 68.176,1.824 67.962,1.623 67.734,1.436 67.496,1.265 67.246,1.11 66.987,0.971 66.719,0.85 66.444,0.747 66.163,0.661 65.876,0.594 65.586,0.547 65.294,0.518 65.018,0.509 65,0.51 5,0.51 4.982,0.509 4.706,0.518 4.414,0.547 4.124,0.594 3.837,0.661 3.556,0.747 3.281,0.85 3.013,0.971 2.754,1.11 2.504,1.265 2.266,1.436 2.038,1.623 1.824,1.824 1.623,2.038 1.436,2.266 1.265,2.504 1.11,2.754 0.971,3.013 0.85,3.281 0.747,3.556 0.661,3.837 0.594,4.124 0.547,4.414 0.518,4.706 0.509,4.982 0.51,5 0.51,65 0.509,65.018 0.518,65.294 0.547,65.586 0.594,65.876 0.661,66.163 0.747,66.444 0.85,66.719 0.971,66.987 1.11,67.246 1.265,67.496 1.436,67.734 1.623,67.962 1.824,68.176 2.038,68.377 2.266,68.564 2.504,68.735 2.754,68.89 3.013,69.029 3.281,69.15 3.556,69.253 3.837,69.339 4.124,69.406 4.414,69.453 4.706,69.482 4.982,69.491 5,69.49 65,69.49 65.018,69.491
GND on InternalPlane1 (split plane): 65.294,69.482 65.586,69.453 65.876,69.406 66.163,69.339 66.444,69.254 66.719,69.15 66.987,69.029 67.246,68.89 67.496,68.735 67.734,68.564 67.962,68.377 68.176,68.176 68.377,67.962 68.564,67.734 68.735,67.496 68.89,67.246 69.029,66.987 69.15,66.719 69.253,66.444 69.339,66.163 69.406,65.876 69.453,65.586 69.482,65.294 69.491,65.018 69.49,65 69.49,5 69.491,4.982 69.482,4.706 69.453,4.414 69.406,4.124 69.339,3.837 69.253,3.556 69.15,3.281 69.029,3.013 68.89,2.754 68.735,2.504 68.564,2.266 68.377,2.038 68.176,1.824 67.962,1.623 67.734,1.436 67.496,1.265 67.246,1.11 66.987,0.971 66.719,0.85 66.444,0.747 66.163,0.661 65.876,0.594 65.586,0.547 65.294,0.518 65.018,0.509 65,0.51 5,0.51 4.982,0.509 4.706,0.518 4.414,0.547 4.124,0.594 3.837,0.661 3.556,0.747 3.281,0.85 3.013,0.971 2.754,1.11 2.504,1.265 2.266,1.436 2.038,1.623 1.824,1.824 1.623,2.038 1.436,2.266 1.265,2.504 1.11,2.754 0.971,3.013 0.85,3.281 0.747,3.556 0.661,3.837 0.594,4.124 0.547,4.414 0.518,4.706 0.509,4.982 0.51,5 0.51,65 0.509,65.018 0.518,65.294 0.547,65.586 0.594,65.876 0.661,66.163 0.747,66.444 0.85,66.719 0.971,66.987 1.11,67.246 1.265,67.496 1.436,67.734 1.623,67.962 1.824,68.176 2.038,68.377 2.266,68.564 2.504,68.735 2.754,68.89 3.013,69.029 3.281,69.15 3.556,69.253 3.837,69.339 4.124,69.406 4.414,69.453 4.706,69.482 4.982,69.491 5,69.49 65,69.49 65.018,69.491

## Other copper
Top Layer:
  rectangle net GND: 35.392,33.632 38.019,34.475
  rectangle net GND: 35.521,36.557 38.85,38.406
  rectangle net 3V3: 41,8.9 48.4,12.75
  rectangle net 3V3: 40.05,12.15 42.8,13.9
  rectangle net 3V3: 40.05,9.85 44.386,12.75
  rectangle net 5V: 50.727,35.2 58.65,36.8
  rectangle net 5V: 19.45,39.55 27.3,41.3
  rectangle net GND: 50.3,29.75 50.748,30.75
  rectangle net GND: 29.123,25.143 29.8,26.2
  rectangle net 3V3RF_L01CPU: 60.106,11.9 63.9,14.338
  rectangle net GND: 11.4,45.3 12.585,46.35
  pour cut-out: 28.09,26.966 28.717,26.966 28.717,26.153 29.15,25.72 29.146,25.716 29.146,24.196 28.296,24.196 28.25,24.15 28.1,24.3 28.1,26.965
  pour cut-out: 6.85,25.325 9.95,25.325 9.95,24.025 6.927,24.025 6.85,24.102
  pour cut-out: 6.65,20.435 9.935,20.435 9.95,20.45 9.95,17.75 6.65,17.75
  pour cut-out: 5.5,23.125 5.5,21.437 5.513,21.45 7.49,21.45 7.49,23.155 7.46,23.125

## Silkscreen, mask and mechanical layers (free items; w line width, h text height)
Top Overlay:
  text "Electrosense Wideband Converter v2.0" at 13.65,66.95 h3
  text "Franco Minucci" at 10,65.018 h2.5
  text "Bertold Van den Bergh" at 26.55,65.018 h2.5
  text "Sofie Pollin" at 51.1,64.9 h2.5
  text "*GND" at 1.75,8.05 h1.52
Top Paste:
  rectangle: 17.35,35.3 21.425,38.95
  rectangle: 50.486,41.289 54.561,44.939
Top Solder:
  rectangle: 17.35,35.3 21.425,38.95
  rectangle: 50.486,41.289 54.561,44.939
Board:
  the board outline again, w0.05

## Text inside footprints (layer, text, board x,y; h text height)
JUSB: Mechanical 13 "PCB Edge" at -1.7,17.45 h0.2